# Altium PCB m2t7.PcbDoc (part 1 of 3)
Units mil, origin at the board's own origin, x right, y up, seen from the top; angles counter-clockwise.
Board outline 3925 x 3925 mil, 2 copper layers (TopLayer, BottomLayer); 79 components, 92 nets, 975 pads, 13 vias.
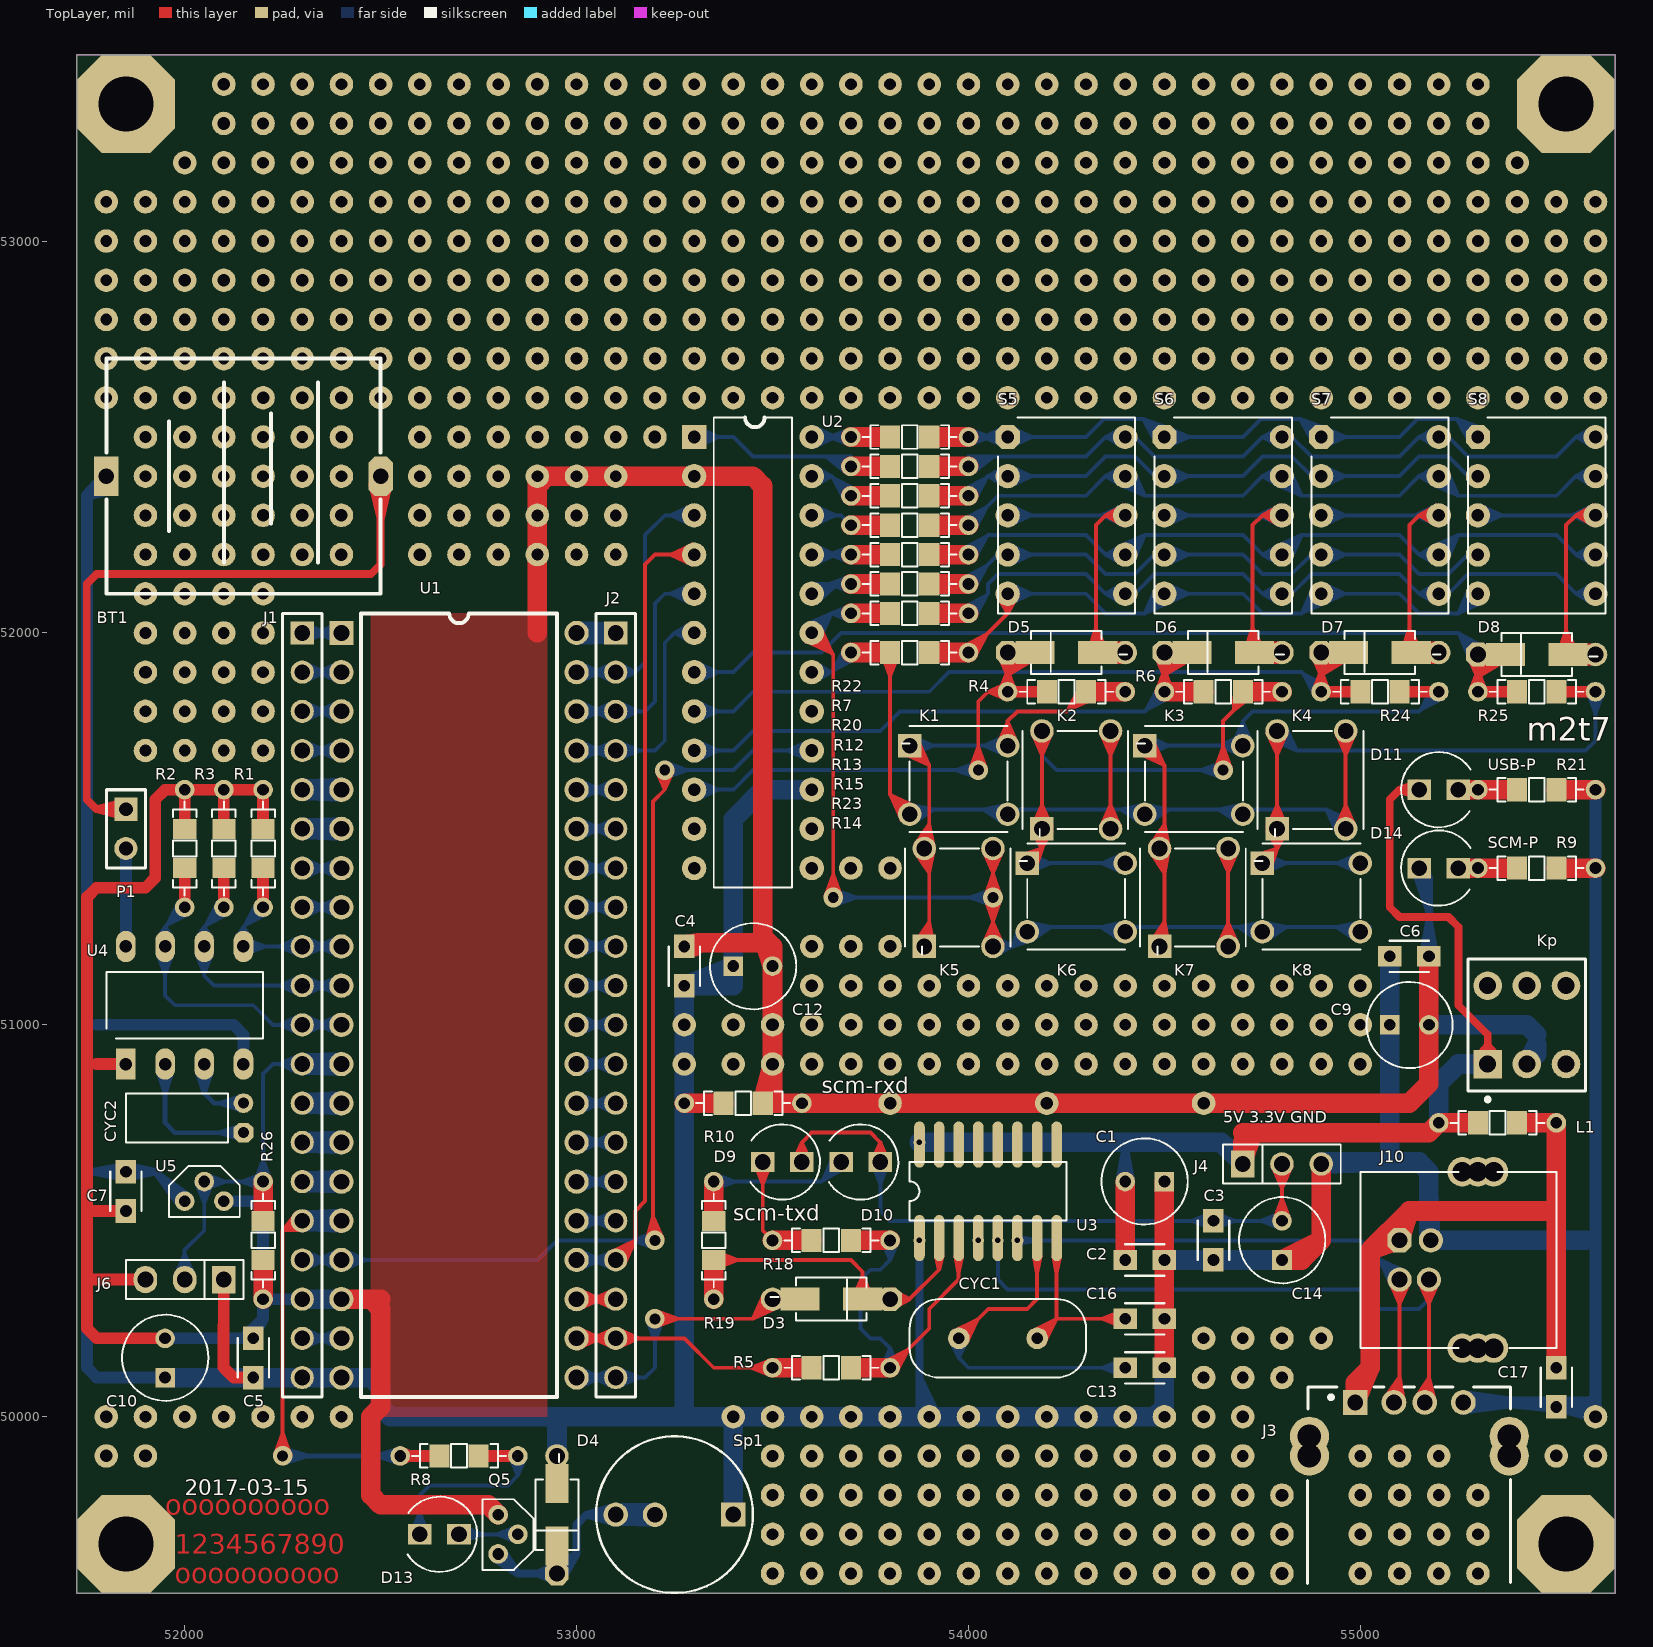
[diagram p0: TopLayer view]
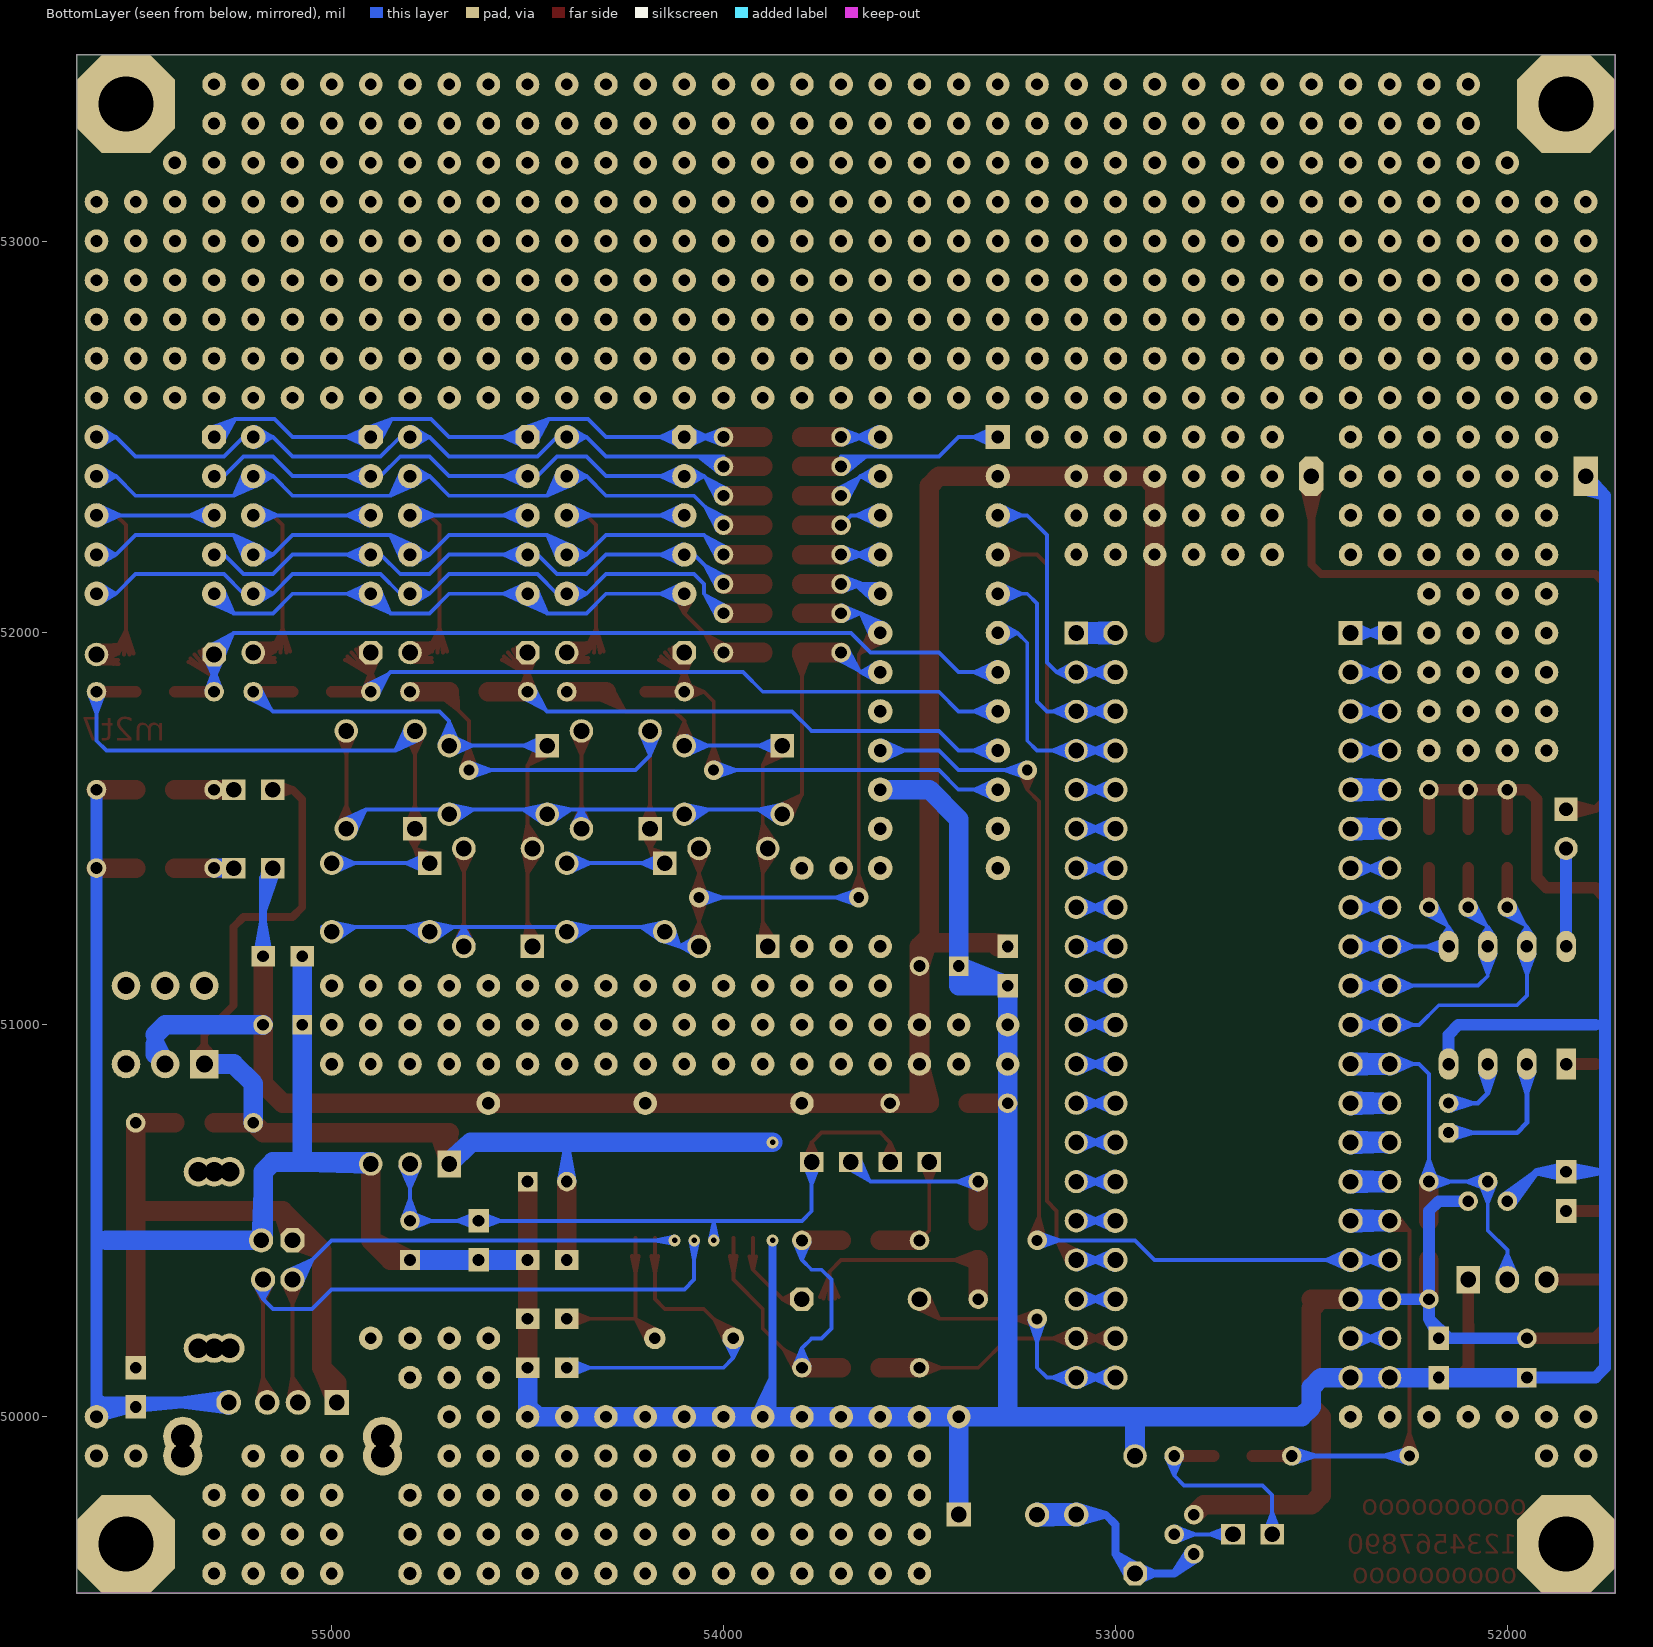
[diagram p1: BottomLayer view, seen from below]

## Layer stack, top to bottom
TopLayer: signal copper 1.4
Dielectric: dielectric 12.6, FR-4, Dk 4.8
BottomLayer: signal copper 1.4

## Board outline
51725,49550 51725,53475 55650,53475 55650,49550

## Design rules (kind name [scope] priority, off if disabled: settings)
AssemblyTestPointUsage [All] p1 off:
AssemblyTestpoint [All] p1 off: testpointundercomponent=TRUE minsize=40 maxsize=100 preferedsize=60 minholesize=0 maxholesize=40 preferedholesize=32 testpointgrid=1 usegrid=TRUE gridtolerance=0.01 allowsidetop=TRUE allowsidebottom=TRUE
Clearance [All] p1: gap=10
ComponentClearance [All] p1 off: gap=10 collisioncheckmode=3 verticalgap=10 showdistances=FALSE
DiffPairsRouting [All] p1 off: maxlimit=10 minlimit=10 mostfreqgap=10 maxuncoupledlength=500
FabricationTestPointUsage TestPointUsage [All] p1 off: valid=0 allowmultiple=FALSE
FabricationTestpoint Testpoint [All] p1 off: side=3 testpointundercomponent=TRUE minsize=40 maxsize=100 preferedsize=60 minholesize=20 maxholesize=40 preferedholesize=32 testpointgrid=1 allowsidetop=TRUE allowsidebottom=TRUE usegrid=TRUE gridtolerance=0.01
FanoutControl Fanout_BGA [IsBGA] p1 off: bgadir=Out bgaviamode=Centered fanoutstyle=Auto fanoutdirection=Alternating viagrid=1 // Fanout_BGA (Default Rule)
FanoutControl Fanout_LCC [IsLCC] p2 off: bgadir=Out bgaviamode=Centered fanoutstyle=Auto fanoutdirection=Alternating viagrid=1 // Fanout_LCC (Default Rule)
FanoutControl Fanout_SOIC [IsSOIC] p3 off: bgadir=Out bgaviamode=Centered fanoutstyle=Auto fanoutdirection=Alternating viagrid=1 // Fanout_SOIC (Default Rule)
FanoutControl Fanout_Small [(CompPinCount < 5)] p4 off: bgadir=Out bgaviamode=Centered fanoutstyle=Auto fanoutdirection=OutThenIn viagrid=1 // Fanout_Small (Default Rule)
FanoutControl Fanout_Default [All] p5 off: bgadir=Out bgaviamode=Centered fanoutstyle=Auto fanoutdirection=Alternating viagrid=1 // Fanout_Default (Default Rule)
Height [All] p1 off: minheight=0 maxheight=1000 prefheight=500
HoleToHoleClearance [All] p1 off: gap=10 allowstackedmicrovias=TRUE
LayerPairs [All] p1 off: enforce=TRUE
MinimumSolderMaskSliver [All] p1 off: minsoldermaskwidth=10
NetAntennae [All] p1 off: netantennaetolerance=0
PasteMaskExpansion [All] p1 off: expansion=0
PlaneClearance [All] p1 off: clearance=20
PlaneConnect [All] p1 off: planeconnectstyle=Relief reliefexpansion=20 reliefentries=4 reliefconductorwidth=10 reliefairgap=10
PolygonConnect [All] p1 off: connectstyle=Relief reliefconductorwidth=10 reliefentries=4 polygonreliefangle="90 Angle"
RoutingPriority [All] p1 off: routingpriority=0
RoutingVias [All] p1: holewidth=28 width=50 viastyle="Through Hole" minholewidth=28 minwidth=50 maxholewidth=28 maxwidth=50
SilkToSilkClearance [All] p1 off: silktosilkclearance=10
SilkscreenOverComponentPads [All] p1 off: minsilkscreentomaskgap=10
SolderMaskExpansion [All] p1 off: expansion=4
Width [All] p1: maxlimit=100 minlimit=10 preferedwidth=30 toplayer_prefwidth=10
Width Width_1 [All] p2 off: maxlimit=100 minlimit=10 preferedwidth=50
Width Width_2 [All] p3 off: maxlimit=100 minlimit=10 preferedwidth=30
6 further rules are at their usual default settings.

## Components (designator, comment, footprint, x,y, rotation, side; value= is the part's Value field where it differs from the comment)
BT1 "3.6V" batt 52500,52400 r180 top
C1 "100u/16v" rb.1/.2 54450,50600 r0 top
C2 "CAP" cap010805 54400,50400 r0 top
C3 "103" cap010805 54625,50500 r270 top
C4 "104" cap010805 53275,51200 r270 top
C5 "104" cap010805 52175,50200 r270 top
C6 "104" cap010805 55175,51175 r180 top
C7 "104" cap010805 51850,50525 r90 top
C9 "10u/16v" rb.1/.2 55125,51000 r180 top
C10 "10u/16v" rb.1/.2 51950,50150 r270 top
C12 "10u/16v" rb.1/.2 53450,51150 r180 top
C13 "104" cap010805 54400,50125 r0 top
C14 "10u/16v" rb.1/.2 54800,50450 r270 top
C16 "" cap010805 54400,50250 r0 top
C17 "104" cap010805 55500,50125 r270 top
CYC1 "12Mhz" cyc-rad 54175,50200 r180 top
CYC2 "32.768" cyc-3 52150,50725 r90 top
D3 "sma03" smc03 53800,50300 r180 top
D4 "sma03" smc03 52950,49600 r90 top
D5 "sma03" smc03 54100,51950 r0 top
D6 "sma03" smc03 54500,51950 r0 top
D7 "sma03" smc03 54900,51950 r0 top
D8 "sma03" smc03 55300,51945 r0 top
D9 "LED" led30805 53525,50650 r180 top
D10 "LED" led30805 53725,50650 r180 top
D11 "LED" led30805 55200,51600 r0 top
D13 "LED" led30805 52650,49700 r180 top
D14 "LED" led30805 55200,51400 r0 top
J1 "Header 20" HDR1X20 52300,52000 r270 top
J2 "Header 20" HDR1X20 53100,52000 r270 top
J3 "USB-a" usb-a 55125,49925 r270 top
J4 "Header 20" SIP3#1 54800,50645 r0 top
J6 "CON3" SIP3#2 52000,50350 r180 top
J10 "" USB_b 55100,50450 r90 top
K1 "6-6-5" pb6_6 53975,51625 r0 top
K2 "6-6-5" pb6_6 54275,51625 r90 top
K3 "6-6-5" pb6_6 54575,51625 r0 top
K4 "6-6-5" pb6_6 54875,51625 r90 top
K5 "6-6-5" pb6_6 53975,51325 r90 top
K6 "6-6-5" pb6_6 54275,51325 r0 top
K7 "6-6-5" pb6_6 54575,51325 r90 top
K8 "6-6-5" pb6_6 54875,51325 r0 top
Kp "SW-DPDT" DPDT-6 55424.76,51000 r90 top
L1 "Res22" a030805 55500,50750 r180 top (schematic designator R20)
P1 "Header 2" HDR1X2 51850,51550 r270 top
Q5 "8550" to-92a 52800,49750 r270 top
R1 "Res22" a030805 52200,51600 r270 top
R2 "Res22" a030805 52000,51600 r270 top
R3 "Res22" a030805 52100,51600 r270 top
R4 "Res2" a030805 54100,51850 r0 top
R5 "Res2" a038050 53800,50125 r180 top
R6 "Res2" a030805 54500,51850 r0 top
R7 "Res22" a030805 53700,52425 r0 top
R8 "Res22" a030805 52850,49900 r180 top
R9 "Res22" a030805 55600,51400 r180 top
R10 "Res2" a038050 53575,50800 r180 top
R12 "Res22" a030805 53700,52275 r0 top
R13 "Res22" a030805 53700,52200 r0 top
R14 "Res22" a030805 53700,51950 r0 top
R15 "Res22" a030805 53700,52125 r0 top
R18 "Res22" a030805 53800,50450 r180 top
R19 "Res22" a030805 53350,50300 r90 top
R20 "Res22" a030805 53700,52350 r0 top
R21 "Res22" a030805 55600,51600 r180 top
R22 "Res22" a030805 53700,52500 r0 top
R23 "Res22" a030805 53700,52050 r0 top
R24 "Res2" a030805 54900,51850 r0 top
R25 "Res2" a030805 55300,51850 r0 top
R26 "Res22" a030805 52200,50300 r90 top
S5 "3911AH" LED10s 54100,52500 r0 top
S6 "3911AH" LED10s 54500,52500 r0 top
S7 "3911AH" LED10s 54900,52500 r0 top
S8 "3911AH" LED10s 55300,52500 r0 top
Sp1 "SPEAKER" sp0.23 53400,49750 r180 top
U1 "IAP15F2K61S2" DIP40 52400,52000 r0 top
U2 "CH451" dip24 53300,52500 r0 top
U3 "IAP15F2K61S2" SOP-16 53850,50575 r0 top
U4 "DS1302" dip8 51850,50900 r90 top
U5 "CON3" to-92a 52000,50550 r0 top

## Footprints (in the part's own frame and the unit in brackets; to place one, negate y for a bottom-side part, rotate by r counter-clockwise, add the part's x,y. Pads: shape width x height; smd on the part's side, far side on the other; paste and mask are expansions set on the pad)
a030805 [mm]
  round 1.27 hole 0.762: 1(0,0) 2(7.62,0)
  rect 1.3x1.5 smd: 3(2.54,0) 4(5.08,0)
  silkscreen extent 0.76,-0.76 6.86,0.76
a038050 [mm]
  round 1.27 hole 0.762: 1(0,0) 2(7.62,0)
  rect 1.3x1.5 smd: 3(2.54,0) 4(5.08,0)
  silkscreen extent 0.76,-0.76 6.86,0.76
batt [mil]
  rect 62x100 hole 40: 1(700,0)
  oct 62x100 hole 40: 2(0,0)
  silkscreen extent 0,-300 700,300
cap010805 [mil] "0.1&0805"
  rect 60x52 hole 30: 1(0,0) 2(100,0)
  silkscreen extent 0,-40 100,40
cyc-3 [mil] "32.786"
  oct 50x50 hole 28: 1(0,0)
  round 50 hole 28: 2(75,0)
  silkscreen extent -25,40 100,300
cyc-rad [mil]
  round 55 hole 30: 1(-0.45,-0.07) 2(199.55,-0.07)
  silkscreen extent -125,-100 325,100
dip8 [mil]
  rect 80x50 hole 32: 1(0,0)
  oval 80x50 hole 32: 2(0,-100) 3(0,-200) 4(0,-300) 5(300,-300) 6(300,-200) 7(300,-100) 8(300,0)
  silkscreen extent 65,-350 235,50
dip24 [mil]
  rect 62x62 hole 32: 1(0,0)
  round 62 hole 32: 2(0,-100) 3(0,-200) 4(0,-300) 5(0,-400) 6(0,-500) 7(0,-600) 8(0,-700) 9(0,-800) 10(0,-900) 11(0,-1000) 12(0,-1100) 13(300,-1100) 14(300,-1000) 15(300,-900) 16(300,-800) 17(300,-700) 18(300,-600) 19(300,-500) 20(300,-400) 21(300,-300) 22(300,-200) 23(300,-100) 24(300,0)
  silkscreen extent 50,-1150 250,50
DIP40 [mil]
  rect 62x62 hole 40: 1(0,0)
  round 62 hole 40: 2(0,-100) 3(0,-200) 4(0,-300) 5(0,-400) 6(0,-500) 7(0,-600) 8(0,-700) 9(0,-800) 10(0,-900) 11(0,-1000) 12(0,-1100) 13(0,-1200) 14(0,-1300) 15(0,-1400) 16(0,-1500) 17(0,-1600) 18(0,-1700) 19(0,-1800) 20(0,-1900) 21(600,-1900) 22(600,-1800) 23(600,-1700) 24(600,-1600) 25(600,-1500) 26(600,-1400) 27(600,-1300) 28(600,-1200) 29(600,-1100) 30(600,-1000) 31(600,-900) 32(600,-800) 33(600,-700) 34(600,-600) 35(600,-500) 36(600,-400) 37(600,-300) 38(600,-200) 39(600,-100) 40(600,0)
  silkscreen extent 50,-1950 550,50
DPDT-6 [mm] "Double-Pole, Double-Throw Switch; 6 Leads"
  rect 1.85x1.85 hole 1.1: 1(-2.54,2.54)
  round 1.85 hole 1.1: 2(-2.54,0) 3(-2.54,-2.54) 4(2.54,-2.54) 5(2.54,0) 6(2.54,2.54)
  silkscreen extent -4.96,-3.81 4.28,3.81
HDR1X2 [mm] "Connector; Header; 2 Position"
  rect 1.5x1.5 hole 0.9: 1(0,0)
  round 1.5 hole 0.9: 2(2.54,0)
  silkscreen extent -1.27,-1.27 3.81,1.27
HDR1X20 [mm] "Connector; Header; 20 Position"
  rect 1.5x1.5 hole 1.016: 1(0,0)
  round 1.5 hole 1.016: 2(2.54,0) 3(5.08,0) 4(7.62,0) 5(10.16,0) 6(12.7,0) 7(15.24,0) 8(17.78,0) 9(20.32,0) 10(22.86,0) 11(25.4,0) 12(27.94,0) 13(30.48,0) 14(33.02,0) 15(35.56,0) 16(38.1,0) 17(40.64,0) 18(43.18,0) 19(45.72,0) 20(48.26,0)
  silkscreen extent -1.27,-1.27 49.53,1.27
LED10s [mil]
  oct 62x62 hole 32: 1(0,0)
  round 62 hole 32: 2(0,-100) 3(0,-200) 4(0,-300) 5(0,-400) 6(300,-400) 7(300,-300) 8(300,-200) 9(300,-100) 10(300,0)
  silkscreen extent -25,-450 325,50
led30805 [mil]
  rect 60x52 hole 40: 1(-50,0) 2(50,0)
  silkscreen extent -96,-96 81,96
pb6_6 [mil] "button"
  rect 60x60 hole 40: 1(-125,87.5)
  round 60 hole 40: 2(-125,-87.5) 3(125,-87.5) 4(125,87.5)
  silkscreen extent -145,-132 125,138
rb.1/.2 [mil]
  rect 50x50 hole 30: 1(50,0)
  round 50 hole 30: 2(-50,0)
  silkscreen extent -110,-110 110,110
SIP3#1 [mil]
  rect 60x70 hole 40: 1(-100,0)
  round 60 hole 40: 2(0,0) 3(100,0)
  silkscreen extent -150,-50 150,50
SIP3#2 [mil]
  rect 60x70 hole 40: 1(-100,0)
  oval 60x70 hole 40: 2(0,0) 3(100,0)
  silkscreen extent -150,-50 150,50
smc03 [mil]
  oct 60x60 hole 40: 1(0,0)
  round 60 hole 40: 2(300,0)
  rect 100x59.06 smd: 3(70,0) 4(230,0)
  silkscreen extent 60,-55 305,55
SOP-16 [mil] "Small Outline; 16 Leads; Body Width 5.6 mm; Pitch 1.27 mm"
  oval 27x118 smd: 1(25,-119) 2(75,-119) 3(125,-119) 4(175,-119) 5(225,-119) 6(275,-119) 7(325,-119) 8(375,-119) 9(375,119.5) 10(325,119.5) 11(275,119.5) 12(225,119.5) 13(175,119.5) 14(125,119.5) 15(75,119.5) 16(25,119.5)
  silkscreen extent 0,-75 400,75
sp0.23 [mil] "speak sip2-sip3"
  rect 62x62 hole 40: 1(0.09,-0.33)
  round 62 hole 40: 2(200,0) 3(300.09,-0.33)
  silkscreen extent -50,-200 350,200
to-92a [mil]
  round 50 hole 30: 1(0,0) 2(50,50) 3(100,0)
  silkscreen extent -39,-40 141,90
usb-a [mm] "Connector; USB, Type A"
  rect 1.6x1.6 hole 1.016: 1(-2.83,-3.5)
  round 1.6 hole 1.016: 2(-2.83,-1) 3(-2.83,1) 4(-2.83,3.5)
  round 2.54 hole 1.524: 5(-0.635,6.477) 5(0.635,6.477) 6(-0.635,-6.477) 6(0.635,-6.477)
  silkscreen extent -3.84,-6.6 8.89,6.57
USB_b [mil]
  oct 62x62 hole 40: 1(0,0)
  round 62 hole 40: 2(-100,0) 3(-100,-75) 4(0,-80)
  round 75 hole 50: 5(-275,-240) 5(-275,-200) 5(-275,-160) 6(175,-200) 6(175,-160) 6(175,-240)
  silkscreen extent -275,-400 175,100

## Part data
BT1: library part BATTERY, "Battery"
C1 C9 C10 C12 C14: library part ELECTRO1, "Electrolytic Capacitor"
C2: "Capacitor"
C3 C4 C5 C6 C7 C17: library part CAP, "Capacitor"
C13 C16: library part CAP
CYC1 CYC2: library part CRYSTAL, "Crystal"
J1 J2: "Header, 20-Pin"
J3 J10: library part CON4, "Connector"
J4: library part CON3, "Connector"
J6 U5: "Connector"
K1 K2 K3 K4 K5 K6 K7 K8: library part SW-PB2
Kp: "Double-Pole, Double-Throw Switch"
L1 R1 R2 R3 R7 R8 R9 R12 R13 R14 R15 R18 R19 R20 R21 R22 R23 R26: "Resistor"
P1: "Header, 2-Pin"
Q5: library part PNP
R4 R5 R6 R10 R24 R25: library part Res22, "Resistor"
S5 S6 S7 S8: library part DS1
Sp1: "SPEAKER sip0.2/0.3"
U1: library part Component_3
U3: library part CH340G
U4: library part DS1302(8), "TRICKLE CHARGE TIMEKEEPING CHIP"

## Free pads (board coordinates)
  round 60 hole 32: 0(51800,50000) 0(52000,52600) 0(52000,52900) 0(52200,52200) 0(52200,52300) 0(53400,50000) 0(54200,50800) 1(51800,49900) 1(52100,52600) 1(52100,52900) 1(52300,52200) 1(52300,52300) 1(54100,50000) 2(51900,49900) 2(52200,52600) 2(52200,52900) 2(52400,52200) 2(52400,52300) 3(52300,52600) 3(52300,52900) 4(51900,51900) 4(52400,52600) 4(52400,52900) 4(52600,52200) 4(52600,52300) 7(52900,53400) 8(52900,53300) 9(52900,53200) 10(52100,53400) 11(52100,53300) 12(52100,53200) 13(52000,53200) 14(55400,53200) 15(55000,51100) 17(55000,50900) 19(53700,51400) 21(53700,51200) 22(53800,51200) 24(53800,51400) 25(53600,51000) 25(53600,51200) 26(53600,50900) 26(53600,51100) 27(53400,51000) 28(53200,52500) 28(53400,50900) 29(53275,51000) 30(53275,50900) 31(54600,50800) 32(53800,50800) 33(53900,49900) 34(54000,49900) 35(54100,49900) 36(54200,49900) 37(54300,49900) 38(54600,50000) 39(54700,50000) 40(54800,49800) 41(54800,49700) 42(54800,49600) 43(55500,49900) 44(55600,49900) 45(55600,50000) 46(53500,51000) 47(53500,50900)
  round 60 hole 30: 0(54600,50900) 0(55200,53400) 1(52900,52400) 1(54700,50900) 2(52000,52700) 2(52000,52800) 2(52000,53000) 2(52000,53100) 2(52200,52400) 2(52200,52500) 2(52500,53200) 2(52500,53300) 2(52500,53400) 2(53000,52400) 2(53300,53200) 2(53300,53300) 2(53300,53400) 2(54100,49800) 2(54700,51000) 3(51900,50000) 3(52100,52700) 3(52100,52800) 3(52100,53000) 3(52100,53100) 3(52300,52400) 3(52300,52500) 3(52600,53200) 3(52600,53300) 3(52600,53400) 3(53100,52400) 3(53400,53200) 3(53400,53300) 3(53400,53400) 3(53500,49600) 3(53500,49700) 3(53600,49600) 3(53600,49700) 3(53700,49600) 3(53700,49700) 3(53800,49600) 3(53800,49700) 3(54200,49800) 3(54400,49600) 3(54400,49700) 3(54500,49600) 3(54500,49700) 3(54600,49600) 3(54600,49700) 3(54700,49600) 3(54700,49700) 3(54800,50900) 4(52000,50000) 4(52200,52700) 4(52200,52800) 4(52200,53000) 4(52200,53100) 4(52400,52400) 4(52400,52500) 4(52700,53200) 4(52700,53300) 4(52700,53400) 4(52900,52300) 4(53500,53200) 4(53500,53300) 4(53500,53400) 4(53900,49600) 4(53900,49700) 4(54300,49800) 4(54900,50900) 5(52100,50000) 5(52300,52700) 5(52300,52800) 5(52300,53000) 5(52300,53100) 5(52900,52200) 5(54000,49600) 5(54000,49700) 5(55000,51000) 6(51900,51700) 6(51900,51800) 6(51900,52000) 6(51900,52100) 6(52200,50000) 6(52400,52700) 6(52400,52800) 6(52400,53000) 6(52400,53100) 6(52600,52400) 6(52600,52500) 6(54100,49600) 6(54100,49700) 6(54500,50000) 7(52000,51700) 7(52000,51800) 7(52000,51900) 7(52000,52000) 7(52000,52100) 7(52300,50000) 7(52500,52600) 7(52500,52700) 7(52500,52800) 7(52500,52900) 7(52500,53000) 7(52500,53100) 7(52700,52200) 7(52700,52300) 7(52700,52400) 7(52700,52500) 7(54200,49600) 7(54200,49700) 7(54400,50000) 8(52100,51700) 8(52100,51800) 8(52100,51900) 8(52100,52000) 8(52100,52100) 8(52400,50000) 8(52600,52600) 8(52600,52700) 8(52600,52800) 8(52600,52900) 8(52600,53000) 8(52600,53100) 8(52800,52200) 8(52800,52300) 8(52800,52400) 8(52800,52500) 8(54300,49600) 8(54300,49700) 8(54300,50000) 9(52200,51700) 9(52200,51800) 9(52200,51900) 9(52200,52000) 9(52200,52100) 9(52700,52600) 9(52700,52700) 9(52700,52800) 9(52700,52900) 9(52700,53000) 9(52700,53100) 9(52900,52500) 9(54200,50000) 10(52800,52600) 10(52800,52700) 10(52800,52800) 10(52800,52900) 10(52800,53000) 10(52800,53100) 10(53000,52200) 10(53000,52300) 10(53000,52500) 10(54600,50100) 11(52900,52600) 11(52900,52700) 11(52900,52800) 11(52900,52900) 11(52900,53000) 11(52900,53100) 11(53100,52200) 11(53100,52300) 11(53100,52500) 11(54700,50100) 12(53000,52600) 12(53000,52700) 12(53000,52800) 12(53000,52900) 12(53000,53000) 12(53000,53100) 12(54800,50100) 13(53100,52600) 13(53100,52700) 13(53100,52800) 13(53100,52900) 13(53100,53000) 13(53100,53100) 13(54800,50200) 14(53200,52600) 14(53200,52700) 14(53200,52800) 14(53200,52900) 14(53200,53000) 14(53200,53100) 14(54700,50200) 15(53300,52600) 15(53300,52700) 15(53300,52800) 15(53300,52900) 15(53300,53000) 15(53300,53100) 15(54600,50200) 16(53400,52600) 16(53400,52700) 16(53400,52800) 16(53400,52900) 16(53400,53000) 16(53400,53100) 16(54900,50200) 17(53500,52600) 17(53500,52700) 17(53500,52800) 17(53500,52900) 17(53500,53000) 17(53500,53100) 17(55000,49800) 18(53600,52600) 18(53600,52700) 18(53600,52800) 18(53600,52900) 18(53600,53000) 18(53600,53100) 18(53600,53200) 18(53600,53300) 18(53600,53400) 18(55000,49700) 19(53700,52600) 19(53700,52700) 19(53700,52800) 19(53700,52900) 19(53700,53000) 19(53700,53100) 19(53700,53200) 19(53700,53300) 19(53700,53400) 19(55000,49600) 20(53700,50900) 20(53700,51000) 20(53700,51100) 20(53800,52600) 20(53800,52700) 20(53800,52800) 20(53800,52900) 20(53800,53000) 20(53800,53100) 20(53800,53200) 20(53800,53300) 20(53800,53400) 20(55100,49600) 21(53800,50900) 21(53800,51000) 21(53800,51100) 21(53900,52600) 21(53900,52700) 21(53900,52800) 21(53900,52900) 21(53900,53000) 21(53900,53100) 21(53900,53200) 21(53900,53300) 21(53900,53400) 21(55200,49600) 22(53900,50900) 22(53900,51000) 22(53900,51100) 22(54000,52600) 22(54000,52700) 22(54000,52800) 22(54000,52900) 22(54000,53000) 22(54000,53100) 22(54000,53200) 22(54000,53300) 22(54000,53400) 22(55300,49600) 23(54000,50900) 23(54000,51000) 23(54000,51100) 23(54100,52600) 23(54100,52700) 23(54100,52800) 23(54100,52900) 23(54100,53000) 23(54100,53100) 23(54100,53200) 23(54100,53300) 23(54100,53400) 23(55300,49700) 24(54100,50900) 24(54100,51000) 24(54100,51100) 24(54200,52600) 24(54200,52700) 24(54200,52800) 24(54200,52900) 24(54200,53000) 24(54200,53100) 24(54200,53200) 24(54200,53300) 24(54200,53400) 24(55300,49800) 25(54200,50900) 25(54200,51000) 25(54200,51100) 25(54300,52600) 25(54300,52700) 25(54300,52800) 25(54300,52900) 25(54300,53000) 25(54300,53100) 25(54300,53200) 25(54300,53300) 25(54300,53400) 25(55200,49800) 26(54300,50900) 26(54300,51000) 26(54300,51100) 26(54400,52600) 26(54400,52700) 26(54400,52800) 26(54400,52900) 26(54400,53000) 26(54400,53100) 26(54400,53200) 26(54400,53300) 26(54400,53400) 26(55200,49700) 27(54400,50900) 27(54400,51000) 27(54400,51100) 27(54500,52600) 27(54500,52700) 27(54500,52800) 27(54500,52900) 27(54500,53000) 27(54500,53100) 27(54500,53200) 27(54500,53300) 27(54500,53400) 27(55100,49700) 28(54500,50900) 28(54500,51000) 28(54500,51100) 28(54600,52600) 28(54600,52700) 28(54600,52800) 28(54600,52900) 28(54600,53000) 28(54600,53100) 28(54600,53200) 28(54600,53300) 28(54600,53400) 28(55100,49800) 29(54600,51000) 29(54600,51100) 29(54700,52600) 29(54700,52700) 29(54700,52800) 29(54700,52900) 29(54700,53000) 29(54700,53100) 29(54700,53200) 29(54700,53300) 29(54700,53400) 29(55100,49900) 30(54700,51100) 30(54800,52600) 30(54800,52700) 30(54800,52800) 30(54800,52900) 30(54800,53000) 30(54800,53100) 30(54800,53200) 30(54800,53300) 30(54800,53400) 30(55000,49900) 31(54800,51000) 31(54800,51100) 31(54900,52600) 31(54900,52700) 31(54900,52800) 31(54900,52900) 31(54900,53000) 31(54900,53100) 31(54900,53200) 31(54900,53300) 31(54900,53400) 31(55200,49900) 32(53500,50000) 32(54900,51000) 32(54900,51100) 32(55000,52600) 32(55000,52700) 32(55000,52800) 32(55000,52900) 32(55000,53000) 32(55000,53100) 32(55000,53200) 32(55000,53300) 32(55000,53400) 33(53600,50000) 33(55100,52600) 33(55100,52700) 33(55100,52800) 33(55100,52900) 33(55100,53000) 33(55100,53100) 33(55100,53200) 33(55100,53300) 33(55100,53400) 33(55400,52600) 33(55400,52700) 33(55400,52800) 33(55400,52900) 33(55400,53000) 33(55400,53100) 34(53700,50000) 34(55200,52600) 34(55200,52700) 34(55200,52800) 34(55200,52900) 34(55200,53000) 34(55200,53100) 34(55200,53200) 34(55200,53300) 34(55500,52600) 34(55500,52700) 34(55500,52800) 34(55500,52900) 34(55500,53000) 34(55500,53100) 35(53800,50000) 35(55300,52600) 35(55300,52700) 35(55300,52800) 35(55300,52900) 35(55300,53000) 35(55300,53100) 35(55300,53200) 35(55300,53300) 35(55300,53400) 35(55600,52600) 35(55600,52700) 35(55600,52800) 35(55600,52900) 35(55600,53000) 35(55600,53100) 36(51900,52500) 36(52200,53400) 36(52800,53400) 36(53000,53400) 36(53900,50000) 37(51900,52400) 37(52200,53300) 37(52800,53300) 37(53000,53300) 37(54000,50000) 38(51800,52700) 38(51800,53000) 38(52000,52400) 38(52300,53300) 38(53100,53300) 39(51800,52800) 39(51800,53100) 39(52000,52500) 39(52300,53400) 39(53100,53400) 40(51900,52800) 40(51900,53100) 40(52100,52500) 40(52400,53400) 40(53200,53400) 41(51900,52700) 41(51900,53000) 41(52100,52400) 41(52400,53300) 41(53200,53300) 42(51900,52600) 42(51900,52900) 42(52100,52200) 42(52100,52300) 42(52400,53200) 42(53200,53200) 42(54000,49800) 43(51800,52600) 43(51800,52900) 43(52000,52200) 43(52000,52300) 43(52300,53200) 43(53100,53200) 43(53900,49800) 44(51900,52200) 44(51900,52300) 44(52200,53200) 44(52800,53200) 44(53000,53200) 44(53500,49800) 44(53500,49900) 44(53600,49800) 44(53600,49900) 44(53700,49800) 44(53700,49900) 44(53800,49800) 44(53800,49900) 44(54400,49800) 44(54400,49900) 44(54500,49800) 44(54500,49900) 44(54600,49800) 44(54600,49900) 44(54700,49800) 44(54700,49900)
  oct 250x250 hole 140: 1(51850,53350) 2(51850,49675) 3(55525,49675) 4(55525,53350)

## Via types
v1: diameter 50, hole 28, TopLayer to BottomLayer, 8 vias
v2: diameter 30, hole 14, TopLayer to BottomLayer, 5 vias

## Nets (pads, with @x,y where several pads share a name; then routed paths per layer and width w, separated by ;. In a path a pad name is that pad's centre, name@x,y a point inside that pad or via, vN(x,y) a via of type N, cw(c..) or ccw(c..) an arc to the next point about the centre after c; other vN are vias at no path point)
A: R7.2 R7.4 S5.10 S6.10 S7.10 S8.10 | length 4008.8
  TopLayer w50: R7.4@53900,52425 R7.2@54000,52425
  BottomLayer w10: R7.2@53995.51,52444.49 54063.91,52450 ; R7.2@53997.05,52434.55 54063.91,52450 ; R7.2@54000,52425 54063.91,52450 ; 54000,52450 54300,52450 54350,52500 ; R7.2@54004.31,52415.98 54063.91,52450 ; R7.2@54009.92,52407.63 54063.91,52450 ; S5.10@54393.24,52474.89 54350,52500 ; S5.10@54393.24,52525.11 54350,52500 ; S5.10@54397.44,52484.21 54350,52500 ; S5.10@54397.44,52515.79 54350,52500 ; S5.10@54399.64,52494.01 54350,52500 ; S5.10@54399.64,52505.99 54350,52500 ; S6.10@54793.24,52474.89 54750,52500 ; S6.10@54793.24,52525.11 54750,52500 ; S6.10@54797.44,52484.21 54750,52500 ; S6.10@54797.44,52515.79 54750,52500 ; S6.10@54799.64,52494.01 54750,52500 ; S6.10@54799.64,52505.99 54750,52500 ; S8.10@55593.24,52474.89 55550,52500 ; S8.10@55593.24,52525.11 55550,52500 ; S8.10@55597.44,52484.21 55550,52500 ; S8.10@55597.44,52515.79 55550,52500 ; S8.10@55599.64,52494.01 55550,52500 ; S8.10@55599.64,52505.99 55550,52500 ; S8.10@55600,52500 55550,52500 ; 54350,52500 S5.10@54400,52500 ; 54350,52500 S5.10@54400,52500 ; S5.10@54400,52500 54425,52500 54475,52450 54700,52450 54750,52500 ; 54750,52500 S6.10@54800,52500 ; 54750,52500 S6.10@54800,52500 ; S6.10@54800,52500 54825,52500 54875,52450 55100,52450 ; 55100,52450 55150,52500 ; 55100,52450 55150,52500 ; 55150,52500 S7.10@55200,52500 ; 55150,52500 S7.10@55200,52500 ; 55150,52500 55193.24,52474.89 55150,52500 ; 55150,52500 55193.24,52525.11 55150,52500 ; 55150,52500 55197.44,52484.21 55150,52500 ; 55150,52500 55197.44,52515.79 55150,52500 ; 55150,52500 55199.64,52494.01 55150,52500 ; 55150,52500 55199.64,52505.99 55150,52500 ; 55150,52500 S7.10@55200,52500 ; 55150,52500 S7.10@55200,52500 ; S7.10@55200,52500 55225,52500 55275,52450 55500,52450 55550,52500
B: R12.2 R12.4 S5.9 S6.9 S7.9 S8.9 | length 5231
  TopLayer w50: R12.4@53900,52275 R12.2@54000,52275
  BottomLayer w10: R12.2@53988.19,52291.14 54046.21,52321.21 ; R12.2@53993.49,52282.59 54046.21,52321.21 ; R12.2@54000,52275 54075,52350 54300,52350 54350,52400 ; R12.2@54007.59,52268.49 54046.21,52321.21 ; R12.2@54016.14,52263.19 54046.21,52321.21 ; S5.9@54385.31,52378.55 54450,52350 ; S5.9@54390.04,52387.48 54450,52350 ; S5.9@54393.24,52374.89 54350,52400 ; S5.9@54393.24,52425.11 54350,52400 ; S5.9@54395.94,52395.58 54450,52350 ; S5.9@54397.44,52384.21 54350,52400 ; S5.9@54397.44,52415.79 54350,52400 ; S5.9@54399.64,52394.01 54350,52400 ; S5.9@54399.64,52405.99 54350,52400 ; S5.9@54404.42,52404.06 54450,52350 ; S5.9@54412.52,52409.96 54450,52350 ; S5.9@54421.45,52414.69 54450,52350 ; S6.9@54785.31,52378.55 54850,52350 ; S6.9@54790.04,52387.48 54850,52350 ; S6.9@54793.24,52374.89 54750,52400 ; S6.9@54793.24,52425.11 54750,52400 ; S6.9@54795.94,52395.58 54850,52350 ; S6.9@54797.44,52384.21 54750,52400 ; S6.9@54797.44,52415.79 54750,52400 ; S6.9@54799.64,52394.01 54750,52400 ; S6.9@54799.64,52405.99 54750,52400 ; S6.9@54804.42,52404.06 54850,52350 ; S6.9@54812.52,52409.96 54850,52350 ; S6.9@54821.45,52414.69 54850,52350 ; S7.9@55185.31,52378.55 55250,52350 ; S7.9@55190.04,52387.48 55250,52350 ; S7.9@55195.94,52395.58 55250,52350 ; S7.9@55204.42,52404.06 55250,52350 ; S7.9@55212.52,52409.96 55250,52350 ; S7.9@55221.45,52414.69 55250,52350 ; S8.9@55593.24,52374.89 55550,52400 ; S8.9@55593.24,52425.11 55550,52400 ; S8.9@55597.44,52384.21 55550,52400 ; S8.9@55597.44,52415.79 55550,52400 ; S8.9@55599.64,52394.01 55550,52400 ; S8.9@55599.64,52405.99 55550,52400 ; S8.9@55600,52400 55550,52400 ; 54350,52400 S5.9@54400,52400 ; 54350,52400 S5.9@54400,52400 ; S5.9@54400,52400 54450,52350 ; 54450,52350 54700,52350 54750,52400 ; 54750,52400 S6.9@54800,52400 ; 54750,52400 S6.9@54800,52400 ; S6.9@54800,52400 54850,52350 ; 54850,52350 55100,52350 ; 55100,52350 55150,52400 ; 55100,52350 55150,52400 ; 55150,52400 S7.9@55200,52400 ; 55150,52400 S7.9@55200,52400 ; 55150,52400 55193.24,52374.89 55150,52400 ; 55150,52400 55193.24,52425.11 55150,52400 ; 55150,52400 55197.44,52384.21 55150,52400 ; 55150,52400 55197.44,52415.79 55150,52400 ; 55150,52400 55199.64,52394.01 55150,52400 ; 55150,52400 55199.64,52405.99 55150,52400 ; 55150,52400 S7.9@55200,52400 ; 55150,52400 S7.9@55200,52400 ; S7.9@55200,52400 55250,52350 ; 55250,52350 55500,52350 55550,52400
C: R13.2 R13.4 S5.7 S6.7 S7.7 S8.7 | length 5220.6
  TopLayer w50: R13.4@53900,52200 R13.2@54000,52200
  BottomLayer w10: R13.2@53988.19,52216.14 54046.21,52246.21 ; R13.2@53993.49,52207.59 54046.21,52246.21 ; R13.2@54000,52200 54050,52250 54300,52250 54350,52200 ; R13.2@54007.59,52193.49 54046.21,52246.21 ; R13.2@54016.14,52188.19 54046.21,52246.21 ; S5.7@54385.31,52221.45 54450,52250 ; S5.7@54390.04,52212.52 54450,52250 ; S5.7@54393.24,52174.89 54350,52200 ; S5.7@54393.24,52225.11 54350,52200 ; S5.7@54395.94,52204.42 54450,52250 ; S5.7@54397.44,52184.21 54350,52200 ; S5.7@54397.44,52215.79 54350,52200 ; S5.7@54399.64,52194.01 54350,52200 ; S5.7@54399.64,52205.99 54350,52200 ; S5.7@54404.42,52195.94 54450,52250 ; S5.7@54412.52,52190.04 54450,52250 ; S5.7@54421.45,52185.31 54450,52250 ; S6.7@54785.31,52221.45 54850,52250 ; S6.7@54790.04,52212.52 54850,52250 ; S6.7@54793.24,52174.89 54750,52200 ; S6.7@54793.24,52225.11 54750,52200 ; S6.7@54795.94,52204.42 54850,52250 ; S6.7@54797.44,52184.21 54750,52200 ; S6.7@54797.44,52215.79 54750,52200 ; S6.7@54799.64,52194.01 54750,52200 ; S6.7@54799.64,52205.99 54750,52200 ; S6.7@54804.42,52195.94 54850,52250 ; S6.7@54812.52,52190.04 54850,52250 ; S6.7@54821.45,52185.31 54850,52250 ; S7.7@55185.31,52221.45 55250,52250 ; S7.7@55190.04,52212.52 55250,52250 ; S7.7@55195.94,52204.42 55250,52250 ; S7.7@55204.42,52195.94 55250,52250 ; S7.7@55212.52,52190.04 55250,52250 ; S7.7@55221.45,52185.31 55250,52250 ; S8.7@55593.24,52174.89 55550,52200 ; S8.7@55593.24,52225.11 55550,52200 ; S8.7@55597.44,52184.21 55550,52200 ; S8.7@55597.44,52215.79 55550,52200 ; S8.7@55599.64,52194.01 55550,52200 ; S8.7@55599.64,52205.99 55550,52200 ; S8.7@55600,52200 55550,52200 ; 54350,52200 S5.7@54400,52200 ; 54350,52200 S5.7@54400,52200 ; S5.7@54400,52200 54450,52250 ; 54450,52250 54700,52250 54750,52200 ; 54750,52200 S6.7@54800,52200 ; 54750,52200 S6.7@54800,52200 ; S6.7@54800,52200 54850,52250 ; 54850,52250 55100,52250 ; 55100,52250 55150,52200 ; 55100,52250 55150,52200 ; 55150,52200 S7.7@55200,52200 ; 55150,52200 S7.7@55200,52200 ; 55150,52200 55193.24,52174.89 55150,52200 ; 55150,52200 55193.24,52225.11 55150,52200 ; 55150,52200 55197.44,52184.21 55150,52200 ; 55150,52200 55197.44,52215.79 55150,52200 ; 55150,52200 55199.64,52194.01 55150,52200 ; 55150,52200 55199.64,52205.99 55150,52200 ; 55150,52200 S7.7@55200,52200 ; 55150,52200 S7.7@55200,52200 ; S7.7@55200,52200 55250,52250 ; 55250,52250 55500,52250 55550,52200
D: R14.2 R14.4 S5.5 S6.5 S7.5 S8.5 | length 4760
  TopLayer w10: R14.2@53988.19,51966.14 54046.21,51996.21 ; R14.2@53993.49,51957.59 54046.21,51996.21 ; R14.2@54000,51950 54100,52050 ; R14.2@54007.59,51943.49 54046.21,51996.21 ; R14.2@54016.14,51938.19 54046.21,51996.21 ; S5.5@54074.89,52093.24 54100,52050 ; S5.5@54084.21,52097.44 54100,52050 ; S5.5@54094.01,52099.64 54100,52050 ; S5.5@54100,52100 54100,52050 ; S5.5@54105.99,52099.64 54100,52050 ; S5.5@54115.79,52097.44 54100,52050 ; S5.5@54125.11,52093.24 54100,52050
  TopLayer w50: R14.4@53900,51950 R14.2@54000,51950
  BottomLayer w10: S5.5@54100,52100 54300,52100 54350,52050 54450,52050 ; S5.5@54100.3,52094.01 54161,52100 ; S5.5@54100.3,52105.99 54161,52100 ; S5.5@54102.1,52084.14 54161,52100 ; S5.5@54102.1,52115.86 54161,52100 ; S5.5@54105.54,52074.6 54161,52100 ; S5.5@54105.54,52125.4 54161,52100 ; S6.5@54478.55,52114.69 54450,52050 ; S6.5@54487.48,52109.96 54450,52050 ; S6.5@54495.58,52104.06 54450,52050 ; S6.5@54500.3,52094.01 54561,52100 ; S6.5@54500.3,52105.99 54561,52100 ; S6.5@54502.1,52084.14 54561,52100 ; S6.5@54502.1,52115.86 54561,52100 ; S6.5@54504.06,52095.58 54450,52050 ; S6.5@54505.54,52074.6 54561,52100 ; S6.5@54505.54,52125.4 54561,52100 ; S6.5@54509.96,52087.48 54450,52050 ; S6.5@54514.69,52078.55 54450,52050 ; S7.5@54878.55,52114.69 54850,52050 ; S7.5@54887.48,52109.96 54850,52050 ; S7.5@54895.58,52104.06 54850,52050 ; S7.5@54900.3,52094.01 54961,52100 ; S7.5@54900.3,52105.99 54961,52100 ; S7.5@54902.1,52084.14 54961,52100 ; S7.5@54902.1,52115.86 54961,52100 ; S7.5@54904.06,52095.58 54850,52050 ; S7.5@54905.54,52074.6 54961,52100 ; S7.5@54905.54,52125.4 54961,52100 ; S7.5@54909.96,52087.48 54850,52050 ; S7.5@54914.69,52078.55 54850,52050 ; S8.5@55278.55,52114.69 55250,52050 ; S8.5@55287.48,52109.96 55250,52050 ; S8.5@55295.58,52104.06 55250,52050 ; S8.5@55304.06,52095.58 55250,52050 ; S8.5@55309.96,52087.48 55250,52050 ; S8.5@55314.69,52078.55 55250,52050 ; 54450,52050 S6.5@54500,52100 ; 54450,52050 S6.5@54500,52100 ; S6.5@54500,52100 54700,52100 54750,52050 54850,52050 ; 54850,52050 S7.5@54900,52100 ; 54850,52050 S7.5@54900,52100 ; S7.5@54900,52100 55100,52100 55150,52050 55250,52050 ; 55250,52050 S8.5@55300,52100 55250,52050
DIG0: U2.14
DIG1: U2.13
DIG2: U2.12
DIG3: U2.11
DIG4: D5.1 D5.3 R4.1 R4.3 U2.10 | length 3137.4
  TopLayer w10: v1@54005.29,51653.39 54025,51709 ; v1@54015.04,51650.85 54025,51709 ; v1(54025,51650) 54025,51825 54050,51850 ; v1@54034.96,51650.85 54025,51709 ; v1@54044.71,51653.39 54025,51709 ; D5.1@54075.55,51944.79 54100,51890 ; R4.1@54080.33,51853.64 54100,51905 ; D5.1@54085.12,51948.12 54100,51890 ; R4.1@54090.04,51850.91 54100,51905 ; R4.1@54096,51830.4 54050,51850 ; R4.1@54096,51869.6 54050,51850 ; R4.1@54099,51840.05 54050,51850 ; R4.1@54099,51859.95 54050,51850 ; R4.1@54109.96,51850.91 54100,51905 ; D5.1@54114.88,51948.12 54100,51890 ; R4.1@54119.67,51853.64 54100,51905 ; D5.1@54124.45,51944.79 54100,51890 ; D5.1@54128.45,51962.54 54101.33,51892.98 ; D5.3@54137.57,51958.25 54101.33,51892.98 ; D5.3@54149.53,51950 54101.33,51892.98 ; D5.3@54159.66,51939.59 54101.33,51892.98 ; D5.3@54165.4,51931.3 54101.33,51892.98 ; 54050,51850 R4.1@54100,51850 D5.1@54100,51950 54100,51890
  TopLayer w30: R4.1@54100,51850 R4.3@54200,51850
  BottomLayer w10: U2.10@53300,51600 53400,51600 53450,51650 v1(54025,51650) ; U2.10@53300.3,51594.01 53361,51600 ; U2.10@53300.3,51605.99 53361,51600 ; U2.10@53302.1,51584.14 53361,51600 ; U2.10@53302.1,51615.86 53361,51600 ; U2.10@53305.54,51574.6 53361,51600 ; U2.10@53305.54,51625.4 53361,51600 ; v1@54021.61,51630.29 53966,51650 ; v1@54021.61,51669.71 53966,51650 ; v1@54024.15,51640.04 53966,51650 ; v1@54024.15,51659.96 53966,51650
DIG5: D6.1 D6.3 R6.1 R6.3 U2.9 | length 2922.8
  TopLayer w10: D6.1@54475.55,51944.79 54500,51890 ; R6.1@54480.33,51853.64 54500,51905 ; D6.1@54485.12,51948.12 54500,51890 ; R6.1@54490.04,51850.91 54500,51905 ; R6.1@54500,51850 D6.1@54500,51950 ; R6.1@54509.96,51850.91 54500,51905 ; D6.1@54514.88,51948.12 54500,51890 ; R6.1@54519.67,51853.64 54500,51905 ; D6.1@54524.45,51944.79 54500,51890 ; D6.1@54528.45,51962.54 54501.33,51892.98 ; D6.3@54537.57,51958.25 54501.33,51892.98 ; D6.3@54549.53,51950 54501.33,51892.98 ; D6.3@54559.66,51939.59 54501.33,51892.98 ; D6.3@54565.4,51931.3 54501.33,51892.98
  TopLayer w50: R6.1@54500,51850 R6.3@54600,51850
  BottomLayer w10: U2.9@53300,51700 53400,51700 53450,51750 53775,51750 53825,51800 54450,51800 R6.1@54500,51850 ; U2.9@53300.3,51694.01 53361,51700 ; U2.9@53300.3,51705.99 53361,51700 ; U2.9@53302.1,51684.14 53361,51700 ; U2.9@53302.1,51715.86 53361,51700 ; U2.9@53305.54,51674.6 53361,51700 ; U2.9@53305.54,51725.4 53361,51700 ; R6.1@54483.86,51861.81 54453.79,51803.79 ; R6.1@54492.41,51856.51 54453.79,51803.79 ; R6.1@54506.51,51842.41 54453.79,51803.79 ; R6.1@54511.81,51833.86 54453.79,51803.79
DIG6: D7.1 D7.3 R24.1 R24.3 U2.8 | length 3322.8
  TopLayer w10: D7.1@54875.55,51944.79 54900,51890 ; R24.1@54880.33,51853.64 54900,51905 ; D7.1@54885.12,51948.12 54900,51890 ; R24.1@54890.04,51850.91 54900,51905 ; R24.1@54900,51850 D7.1@54900,51950 ; R24.1@54909.96,51850.91 54900,51905 ; D7.1@54914.88,51948.12 54900,51890 ; R24.1@54919.67,51853.64 54900,51905 ; D7.1@54924.45,51944.79 54900,51890 ; D7.1@54928.45,51962.54 54901.33,51892.98 ; D7.3@54937.57,51958.25 54901.33,51892.98 ; D7.3@54949.53,51950 54901.33,51892.98 ; D7.3@54959.66,51939.59 54901.33,51892.98 ; D7.3@54965.4,51931.3 54901.33,51892.98
  TopLayer w30: R24.1@54900,51850 R24.3@55000,51850
  BottomLayer w10: U2.8@53300,51800 53400,51800 53450,51850 53900,51850 53950,51900 54850,51900 R24.1@54900,51850 ; U2.8@53300.3,51794.01 53361,51800 ; U2.8@53300.3,51805.99 53361,51800 ; U2.8@53302.1,51784.14 53361,51800 ; U2.8@53302.1,51815.86 53361,51800 ; U2.8@53305.54,51774.6 53361,51800 ; U2.8@53305.54,51825.4 53361,51800 ; R24.1@54883.86,51838.19 54853.79,51896.21 ; R24.1@54892.41,51843.49 54853.79,51896.21 ; R24.1@54906.51,51857.59 54853.79,51896.21 ; R24.1@54911.81,51866.14 54853.79,51896.21
DIG7: D8.1 D8.3 R25.1 R25.3 U2.7 | length 4434.5
  TopLayer w10: D8.1@55275.55,51939.79 55300,51885 ; R25.1@55280.33,51853.64 55300,51905 ; D8.1@55285.12,51943.12 55300,51885 ; R25.1@55290.04,51850.91 55300,51905 ; R25.1@55300,51845 R25.1@55300,51850 D8.1@55300,51945 ; R25.1@55309.96,51850.91 55300,51905 ; D8.1@55314.88,51943.12 55300,51885 ; R25.1@55319.67,51853.64 55300,51905 ; D8.1@55324.45,51939.79 55300,51885 ; D8.1@55328.45,51957.54 55301.33,51887.98 ; D8.3@55337.57,51953.25 55301.33,51887.98 ; D8.3@55349.53,51945 55301.33,51887.98 ; D8.3@55359.66,51934.59 55301.33,51887.98 ; D8.3@55365.4,51926.3 55301.33,51887.98
  TopLayer w30: R25.1@55300,51850 R25.3@55400,51850
  BottomLayer w10: U2.7@53300,51900 53400,51900 53450,51950 53625,51950 53675,52000 55250,52000 55300,51950 R25.1@55300,51850 ; U2.7@53300.3,51894.01 53361,51900 ; U2.7@53300.3,51905.99 53361,51900 ; U2.7@53302.1,51884.14 53361,51900 ; U2.7@53302.1,51915.86 53361,51900 ; U2.7@53305.54,51874.6 53361,51900 ; U2.7@53305.54,51925.4 53361,51900 ; D8.1@55275.55,51939.79 55300,51885 ; D8.1@55278.78,51931.78 55252.63,51997.37 ; R25.1@55280.33,51853.64 55300,51905 ; D8.1@55285.12,51943.12 55300,51885 ; D8.1@55287.87,51936.18 55252.63,51997.37 ; R25.1@55290.04,51850.91 55300,51905 ; R25.1@55309.96,51850.91 55300,51905 ; D8.1@55309.99,51956.19 55252.63,51997.37 ; D8.1@55314.88,51943.12 55300,51885 ; D8.1@55315.28,51964.79 55252.63,51997.37 ; R25.1@55319.67,51853.64 55300,51905 ; D8.1@55324.45,51939.79 55300,51885 ; 55252.63,51997.37 D8.1@55300,51945 55300,51885
DP: R23.2 R23.4 S5.6 S6.6 S7.6 S8.6 | length 4083.2
  TopLayer w50: R23.4@53900,52050 R23.2@54000,52050 R23.4@53900,52050
  BottomLayer w10: R23.2@53988.19,52066.14 54046.21,52096.21 ; R23.2@53993.49,52057.59 54046.21,52096.21 ; R23.2@54000,52050 54050,52100 54050,52125 54075,52150 54300,52150 54350,52100 ; R23.2@54007.59,52043.49 54046.21,52096.21 ; R23.2@54016.14,52038.19 54046.21,52096.21 ; S5.6@54393.24,52074.89 54350,52100 ; S5.6@54393.24,52125.11 54350,52100 ; S5.6@54397.44,52084.21 54350,52100 ; S5.6@54397.44,52115.79 54350,52100 ; S5.6@54399.64,52094.01 54350,52100 ; S5.6@54399.64,52105.99 54350,52100 ; S6.6@54793.24,52074.89 54750,52100 ; S6.6@54793.24,52125.11 54750,52100 ; S6.6@54797.44,52084.21 54750,52100 ; S6.6@54797.44,52115.79 54750,52100 ; S6.6@54799.64,52094.01 54750,52100 ; S6.6@54799.64,52105.99 54750,52100 ; S8.6@55593.24,52074.89 55550,52100 ; S8.6@55593.24,52125.11 55550,52100 ; S8.6@55597.44,52084.21 55550,52100 ; S8.6@55597.44,52115.79 55550,52100 ; S8.6@55599.64,52094.01 55550,52100 ; S8.6@55599.64,52105.99 55550,52100 ; S8.6@55600,52100 55550,52100 ; 54350,52100 S5.6@54400,52100 ; 54350,52100 S5.6@54400,52100 ; S5.6@54400,52100 54425,52100 54475,52150 54700,52150 54750,52100 ; 54750,52100 S6.6@54800,52100 ; 54750,52100 S6.6@54800,52100 ; S6.6@54800,52100 54825,52100 54875,52150 55100,52150 ; 55100,52150 55150,52100 ; 55100,52150 55150,52100 ; 55150,52100 S7.6@55200,52100 ; 55150,52100 S7.6@55200,52100 ; 55150,52100 55193.24,52074.89 55150,52100 ; 55150,52100 55193.24,52125.11 55150,52100 ; 55150,52100 55197.44,52084.21 55150,52100 ; 55150,52100 55197.44,52115.79 55150,52100 ; 55150,52100 55199.64,52094.01 55150,52100 ; 55150,52100 55199.64,52105.99 55150,52100 ; 55150,52100 S7.6@55200,52100 ; 55150,52100 S7.6@55200,52100 ; S7.6@55200,52100 55225,52100 55275,52150 55500,52150 55550,52100
E: R15.2 R15.4 S5.4 S6.4 S7.4 S8.4 | length 2839.8
  TopLayer w50: R15.4@53900,52125 R15.2@54000,52125
  BottomLayer w10: R15.2@53988.19,52141.14 54046.21,52171.21 ; R15.2@53993.49,52132.59 54046.21,52171.21 ; R15.2@54000,52125 54075,52200 S5.4@54100,52200 54300,52200 54350,52150 54425,52150 S6.4@54475,52200 ; R15.2@54007.59,52118.49 54046.21,52171.21 ; R15.2@54016.14,52113.19 54046.21,52171.21 ; S5.4@54100.3,52194.01 54161,52200 ; S5.4@54100.3,52205.99 54161,52200 ; S5.4@54102.1,52184.14 54161,52200 ; S5.4@54102.1,52215.86 54161,52200 ; S5.4@54105.54,52174.6 54161,52200 ; S5.4@54105.54,52225.4 54161,52200 ; S6.4@54500,52200 54700,52200 54750,52150 54825,52150 S7.4@54875,52200 ; S6.4@54500.3,52194.01 54561,52200 ; S6.4@54500.3,52205.99 54561,52200 ; S6.4@54502.1,52184.14 54561,52200 ; S6.4@54502.1,52215.86 54561,52200 ; S6.4@54505.54,52174.6 54561,52200 ; S6.4@54505.54,52225.4 54561,52200 ; S7.4@54900,52200 55100,52200 55150,52150 55225,52150 S8.4@55275,52200 ; S7.4@54900.3,52194.01 54961,52200 ; S7.4@54900.3,52205.99 54961,52200 ; S7.4@54902.1,52184.14 54961,52200 ; S7.4@54902.1,52215.86 54961,52200 ; S7.4@54905.54,52174.6 54961,52200 ; S7.4@54905.54,52225.4 54961,52200
F: R20.2 R20.4 S5.2 S6.2 S7.2 S8.2 | length 3279.4
  TopLayer w50: R20.4@53900,52350 R20.2@54000,52350
  BottomLayer w10: R20.2@53988.19,52366.14 54046.21,52396.21 ; R20.2@53993.49,52357.59 54046.21,52396.21 ; R20.2@54000,52350 54050,52400 ; R20.2@54007.59,52343.49 54046.21,52396.21 ; R20.2@54016.14,52338.19 54046.21,52396.21 ; S5.2@54075,52400 S5.2@54100,52400 ; S5.2@54093.24,52374.89 54050,52400 ; S5.2@54093.24,52425.11 54050,52400 ; S5.2@54097.44,52384.21 54050,52400 ; S5.2@54097.44,52415.79 54050,52400 ; S5.2@54099.64,52394.01 54050,52400 ; S5.2@54099.64,52405.99 54050,52400 ; S5.2@54100.3,52394.01 54161,52400 ; S5.2@54100.3,52405.99 54161,52400 ; S5.2@54102.1,52384.14 54161,52400 ; S5.2@54102.1,52415.86 54161,52400 ; S5.2@54105.54,52374.6 54161,52400 ; S5.2@54105.54,52425.4 54161,52400 ; S6.2@54500.3,52394.01 54561,52400 ; S6.2@54500.3,52405.99 54561,52400 ; S6.2@54502.1,52384.14 54561,52400 ; S6.2@54502.1,52415.86 54561,52400 ; S6.2@54505.54,52374.6 54561,52400 ; S6.2@54505.54,52425.4 54561,52400 ; S7.2@54900.3,52394.01 54961,52400 ; S7.2@54900.3,52405.99 54961,52400 ; S7.2@54902.1,52384.14 54961,52400 ; S7.2@54902.1,52415.86 54961,52400 ; S7.2@54905.54,52374.6 54961,52400 ; S7.2@54905.54,52425.4 54961,52400 ; S8.2@55300,52400 55275,52400 55225,52450 55150,52450 55100,52400 S7.2@54900,52400 54875,52400 54825,52450 54750,52450 54700,52400 S6.2@54500,52400 54475,52400 54425,52450 54350,52450 54300,52400 S5.2@54100,52400 ; 54050,52400 S5.2@54100,52400 ; 54050,52400 S5.2@54100,52400